# EAGLE board ad5272_arduino_ethernet_2 (EAGLE 8.1.1)
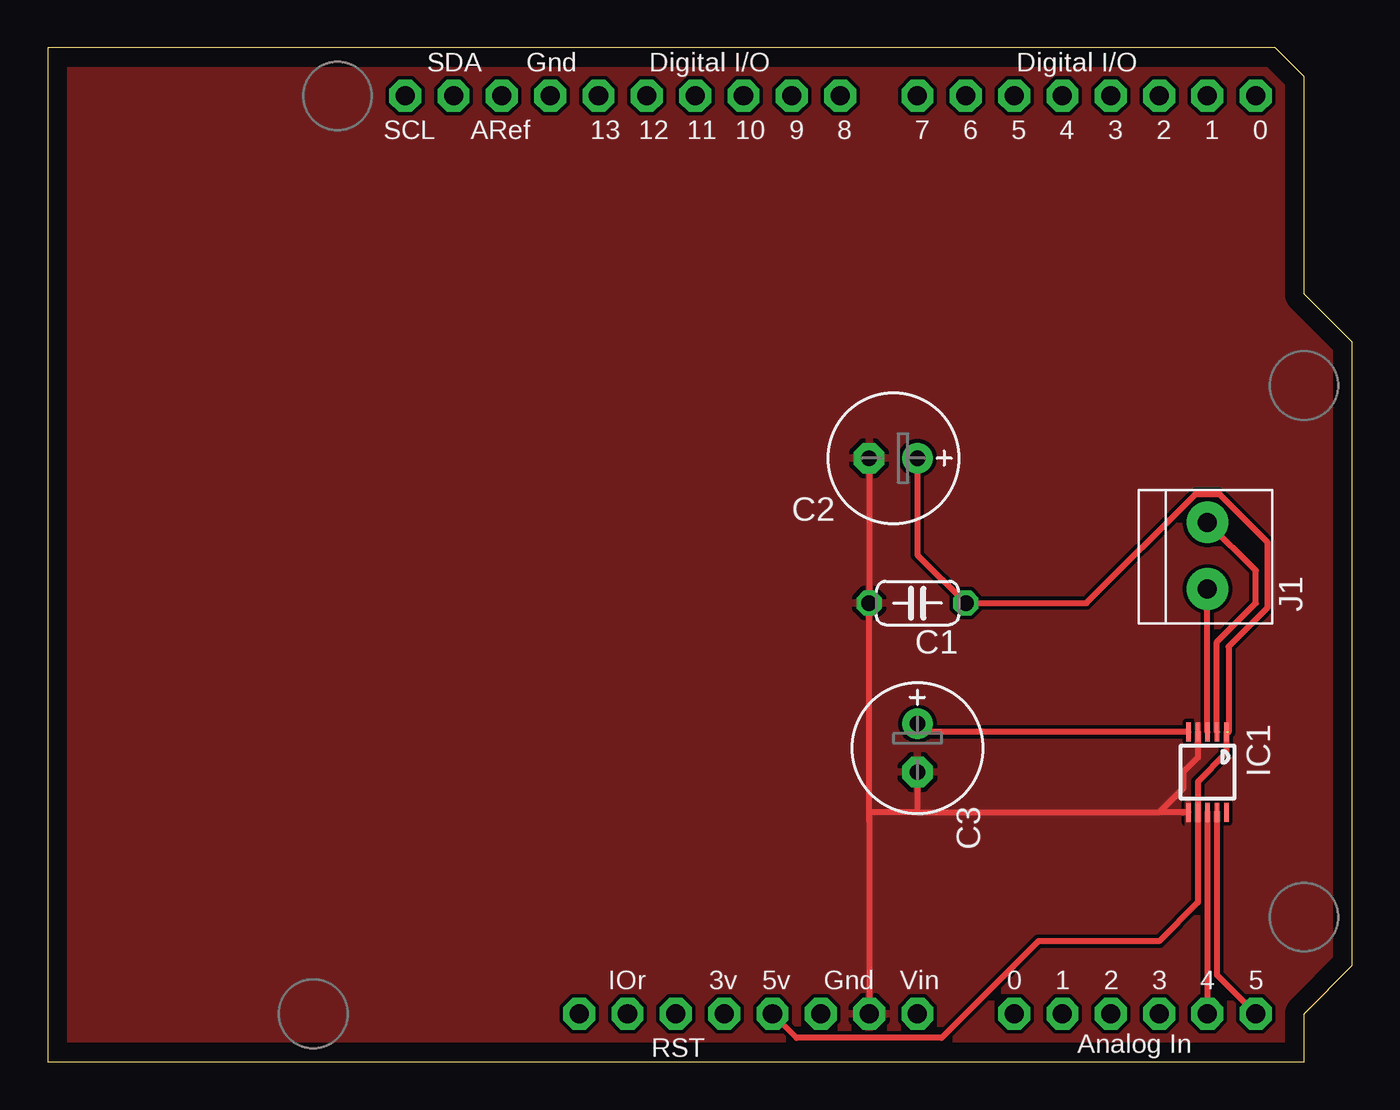
[diagram p0: board, top side]

Size 68.58 x 53.34 mm. Coordinates in mm from the lower left corner, seen from the top.
Copper layers (1*16): Top 0.035mm / dielectric 1.5mm / Bottom 0.035mm
Design rules "default": minimum track width 10mil, minimum drill 24mil, track to track 8mil, track to pad 8mil, pad to pad 8mil, via to via 8mil, smd to smd 8mil, copper to edge 40mil, drill to drill 8mil, minimum pad ring 10mil, minimum via ring 8mil, stop-mask expansion 4mil, vias tented up to drill 0mil, thermal gap 10mil

## Footprints (pad centres in the part's own frame; a part is rotated, then mirrored left to right if it is on the bottom)
C050-024X044 = drill 0.813 octagon: 1 -2.54,0; 2 2.54,0
E2,5-7 = drill 0.813 pad 1.6: + -1.27,0 | drill 0.813 pad 1.6 octagon: - 1.27,0
MSOP10 = smd 0.25 x 1: 1 -1,-2.113; 2 -0.5,-2.113; 3 0,-2.113; 4 0.5,-2.113; 5 1,-2.113; 6 1,2.113; 7 0.5,2.113; 8 0,2.113; 9 -0.5,2.113; 10 -1,2.113
1X2-3.5MM = drill 1 pad 2.184: 1 1.8,0; 2 -1.7,0
ARDUINOR3 = drill 1 pad 1.676 octagon: 3V 35.56,2.54; 5V 38.1,2.54; A0 50.8,2.54; A1 53.34,2.54; A2 55.88,2.54; A3 58.42,2.54; A4 60.96,2.54; A5 63.5,2.54; AREF 23.876,50.8; D0 63.5,50.8; D1 60.96,50.8; D2 58.42,50.8; D3 55.88,50.8; D4 53.34,50.8; D5 50.8,50.8; D6 48.26,50.8; D7 45.72,50.8; D8 41.656,50.8; D9 39.116,50.8; D10 36.576,50.8; D11 34.036,50.8; D12 31.496,50.8; D13 28.956,50.8; GND 26.416,50.8; GND1 43.18,2.54; GND2 40.64,2.54; IOREF 30.48,2.54; RESERVED 27.94,2.54; RESET 33.02,2.54; SCL 18.796,50.8; SDA 21.336,50.8; VIN 45.72,2.54

## Placement (x,y rotation side)
C1  [C050-024X044]  45.72,24.13 180 top
C2  [E2,5-7]  44.45,31.75 180 top
C3  [E2,5-7]  45.72,16.51 270 top
IC1  AD5272  [MSOP10]  60.96,15.24 180 top
J1  1X2-3.5MM  [1X2-3.5MM]  60.96,26.67 270 top
U1  ARDUINOR3-DIMENSION  [ARDUINOR3]  0,0 0 top

## Library data of the parts
C1-C3 = rcl
IC1 = aidj; MPN: AD7992BRMZ-0; OC_FARNELL: 1078311; OC_NEWARK: 31M4422
J1 U1 = adafruit

## Nets
3V: U1.3V
GND: C1.2 C2.- C3.- IC1.4 IC1.6 U1.GND1
GND2: U1.GND2
N$1: IC1.9 U1.A5
N$2: IC1.8 U1.A4
N$4: C3.+ IC1.5
N$5: C1.1 C2.+ IC1.1 IC1.7 U1.5V
N$6: IC1.2 J1.2
N$7: IC1.3 J1.1
VCC: U1.VIN

## Tracks (layer width: path | path; a pad name or v marks a point on that pad's centre or on a via)
GND
  Top 0.305: C2.- C1.2 43.18,12.7 | 43.18,12.7 U1.GND1 | IC1.6 58.42,13.13 | IC1.4 60.46,16.01 59.69,15.24 59.69,14.4 58.42,13.13 | 43.18,12.7 43.18,13.13 45.72,13.13 | 45.72,13.13 58.42,13.13 | C3.- 45.72,13.13
  pour Top: 0,53.34 64.77,53.34 66.04,52.07 66.04,40.64 68.58,38.1 68.58,5.08 66.04,2.54 66.04,0 0,0
N$1
  Top 0.305: IC1.9 61.46,4.58 U1.A5
N$2
  Top 0.305: IC1.8 U1.A4
N$4
  Top 0.305: IC1.5 46.15,17.35 C3.+
N$5  (1 unrouted)
  Top 0.305: C2.+ 45.72,26.67 C1.1 54.6,24.13 60.34,29.87 61.58,29.87 64.11,27.34 64.11,23.88 62.07,21.84 62.07,17.35 | IC1.1 61.96,16.24 60.46,14.74 IC1.7 60.46,8.39 58.42,6.35 52.07,6.35 46.99,1.27 39.37,1.27 U1.5V
N$6
  Top 0.305: IC1.2 61.46,22.09 63.5,24.13 63.5,25.83 J1.2
N$7
  Top 0.305: IC1.3 J1.1